# EAGLE board moodyv1_rzl (EAGLE 6.3)
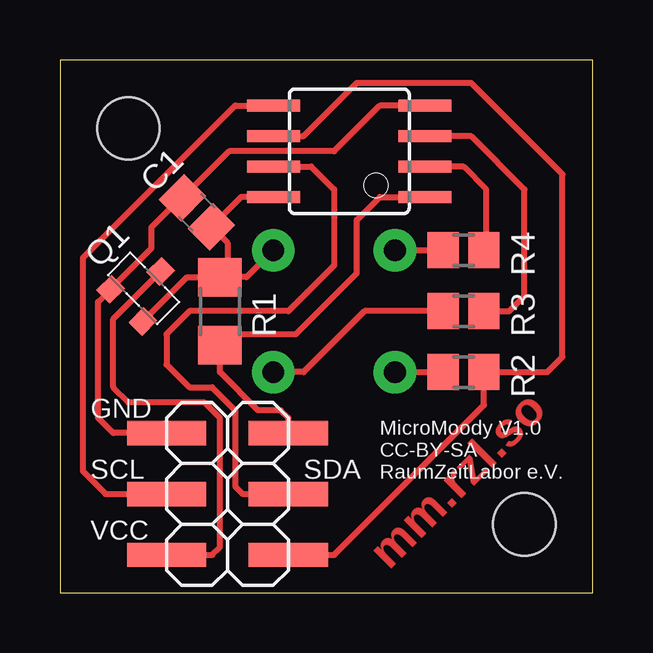
[diagram p0: board, top side]
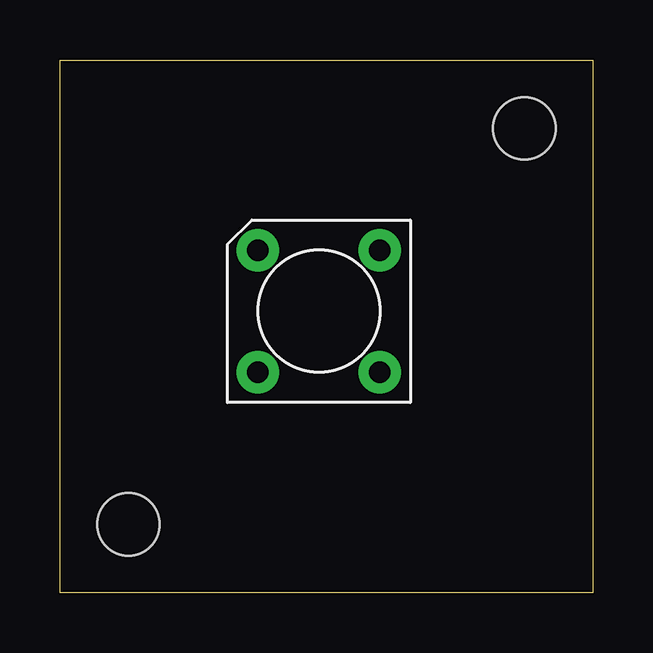
[diagram p1: board, bottom side, seen from below]

Size 22.23 x 22.22 mm. Coordinates in mm from the lower left corner, seen from the top.
Outline: 0,0 22.23,0 22.23,22.22 0,22.22 0,0
Copper layers (1*16): Top 0.035mm / dielectric 1.5mm / Bottom 0.035mm
Design rules "Aetzwerk-DRC 2 Lagen 35цm Cu *": minimum track width 10mil, minimum drill 12mil, track to track 6mil, track to pad 6mil, pad to pad 6mil, via to via 6mil, smd to smd 6mil, copper to edge 20mil, drill to drill 8mil, minimum pad ring 8mil, minimum via ring 6mil, stop-mask expansion 3mil, vias tented up to drill 0mil, thermal gap 8mil
Net classes: 0 default: clearance 0.355 mm
Holes 2.6 mm at 19.37,2.86 2.86,19.37

## Footprints (pad centres in the part's own frame; a part is rotated, then mirrored left to right if it is on the bottom)
C0805 = smd 1.3 x 1.5: 1 -0.85,0; 2 0.85,0
2X03SMD = smd 1.016 x 3.302: 1 -1.27,-3.81; 2 -1.27,1.27; 3 1.27,-3.81; 4 1.27,1.27; 5 3.81,-3.81; 6 3.81,1.27
PIRANHA5MM = drill 0.9 pad 1.778: 1 -2.54,2.54; 2 -2.54,-2.54; 3 2.54,-2.54; 4 2.54,2.54
MICRO3 = smd 0.8 x 0.9: 1 -0.95,-1; 2 0.95,-1; 3 0,1
R1206 = smd 1.6 x 1.803: 1 -1.422,0; 2 1.422,0
R0805 = smd 1.3 x 1.5: 1 -0.85,0; 2 0.85,0
SOIC8 = smd 0.5 x 2.2: 1 -1.905,-3.154; 2 -0.645,-3.154; 3 0.625,-3.154; 4 1.895,-3.154; 5 1.905,3.154; 6 0.635,3.154; 7 -0.635,3.154; 8 -1.905,3.154

## Placement (x,y rotation side)
C1  100nF  [C0805]  5.71,15.88 135 top
JP1  ISP  [2X03SMD]  5.71,2.86 90 top
LED1  RGBLED_CA-PIRANHA  [PIRANHA5MM]  11.43,11.75 0 bottom
Q1  IRLML5203  [MICRO3]  3.49,12.7 315 top
R1  10K  [R1206]  6.67,11.75 90 top
R2  100  [R0805]  16.83,9.21 180 top
R3  100  [R0805]  16.83,11.75 180 top
R4  100  [R0805]  16.83,14.29 180 top
U$1  TINY25/45/85-20SU  [SOIC8]  12.07,18.41 90 top

## Library data of the parts
C1 R1-R4 = resistor
JP1 = pinhead-2
LED1 = adafruit
Q1 = transistor-power
U$1 = avr-7

## Nets
+5V: JP1.2 Q1.3
GND: C1.2 JP1.6 Q1.1 U$1.4
N$1: C1.1 LED1.4 Q1.2 R1.2 U$1.8
N$2: JP1.5 R1.1 U$1.1
N$3: LED1.2 R2.2
N$4: LED1.3 R3.2
N$5: LED1.1 R4.2
N$6: JP1.4 U$1.5
N$7: JP1.3 U$1.7
N$8: JP1.1 R2.1 U$1.6
N$9: R4.1 U$1.2
N$10: R3.1 U$1.3

## Tracks (layer width: path | path; a pad name or v marks a point on that pad's centre or on a via)
+5V
  Top 0.254: JP1.2 6.35,1.59 6.67,1.9 6.67,7.3 6.03,7.94 2.86,7.94 2.22,8.57 2.22,11.43 Q1.3
GND
  Top 0.254: JP1.6 2.22,6.67 1.59,7.3 1.59,12.14 Q1.1 3.81,14.36 3.81,15.24 5.05,16.48 C1.2 7.05,18.41 11.43,18.41 13.33,20.31 U$1.4
N$1
  Top 0.254: R1.2 6.52,13.02 | Q1.2 5.31,13.17 R1.2 | U$1.8 7.55,16.51 C1.1 6.99,14.6 6.99,13.02 6.83,13.17 R1.2 | LED1.4 7.77,13.17 R1.2 | 6.32,13.52 R1.2
N$2
  Top 0.254: JP1.5 9.53,7.3 9.21,7.62 8.26,7.62 6.67,9.21 R1.1 7.14,10.8 9.84,10.8 12.38,13.33 12.38,15.56 13.34,16.51 U$1.1
N$3
  Top 0.254: LED1.2 R2.2
N$4
  Top 0.254: R3.2 12.7,11.75 10.16,9.21 LED1.3
N$5
  Top 0.254: LED1.1 R4.2
N$6
  Top 0.254: JP1.4 1.9,4.13 0.95,5.08 0.95,13.97 7.3,20.32 U$1.5
N$7
  Top 0.254: U$1.7 10.48,17.78 11.43,16.83 11.43,13.65 9.53,11.75 5.4,11.75 4.45,10.8 4.45,9.52 5.4,8.57 6.35,8.57 7.3,7.62 7.3,4.44 7.62,4.13 JP1.3
N$8
  Top 0.254: U$1.6 10.16,19.05 12.38,21.27 17.14,21.27 20.96,17.46 20.96,9.84 20.32,9.21 R2.1 17.68,7.83 11.43,1.59 JP1.1
N$9
  Top 0.254: R4.1 17.78,14.39 17.78,16.83 16.84,17.77 U$1.2
N$10
  Top 0.254: R3.1 18.73,11.75 19.37,12.38 19.37,16.83 17.16,19.04 U$1.3

## Text on the board
Top: mm.rzl.so
tNames: GND | SCL | SDA | MicroMoody V1.0 / CC-BY-SA / RaumZeitLabor e.V. | VCC